# EAGLE board cerewet (EAGLE 7.2.0)
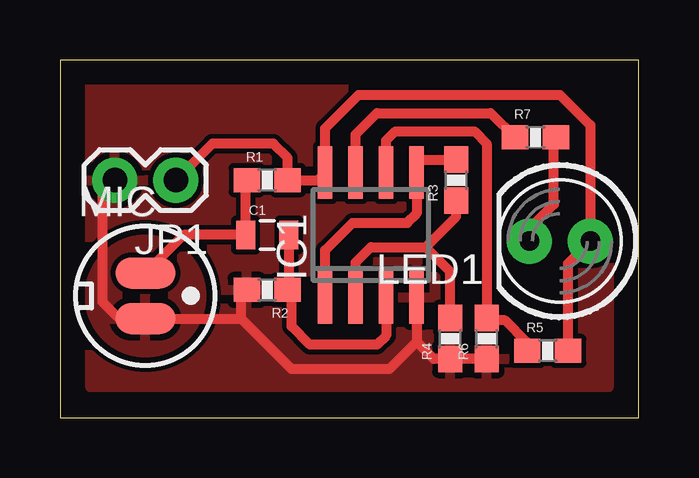
[diagram p0: board, top side]

Size 24.11 x 14.91 mm. Coordinates in mm from the lower left corner, seen from the top.
Outline: 0,0 24.11,0 24.11,14.91 0,14.91 0,0
Copper layers (1*16): Top 0.035mm / dielectric 1.5mm / Bottom 0.035mm
Design rules "default": minimum track width 10mil, minimum drill 24mil, track to track 8mil, track to pad 8mil, pad to pad 8mil, via to via 8mil, smd to smd 8mil, copper to edge 40mil, drill to drill 8mil, minimum pad ring 10mil, minimum via ring 8mil, stop-mask expansion 4mil, vias tented up to drill 0mil, thermal gap 10mil

## Footprints (pad centres in the part's own frame; a part is rotated, then mirrored left to right if it is on the bottom)
0805 = smd 0.8 x 1.2: 1 -0.9,0; 2 0.9,0
SO08 = smd 0.6 x 2.2: 1 -1.905,-2.6; 2 -0.635,-2.6; 3 0.635,-2.6; 4 1.905,-2.6; 5 1.905,2.6; 6 0.635,2.6; 7 -0.635,2.6; 8 -1.905,2.6
1X02 = drill 1.016 pad 1.88: 1 0,0; 2 2.54,0
LED5MM = drill 0.813 pad 1.88: A -1.27,0; K 1.27,0
WM-61A = smd 2.5 x 1.3: 1 0,0.95; 2 0,-0.95
0603-RES = smd 1.1 x 1: 1 -0.85,0; 2 0.85,0

## Placement (x,y rotation side)
C1  0.1uF  [0805]  8.64,7.62 0 top
IC1  LM358D  [SO08]  12.95,7.62 0 top
JP1  PWR  [1X02]  4.83,9.91 180 top
LED1  [LED5MM]  20.83,7.37 180 top
MIC  [WM-61A]  3.56,5.08 0 top
R1  1K  [0603-RES]  8.64,9.91 0 top
R2  100K  [0603-RES]  8.64,5.33 180 top
R3  100K  [0603-RES]  16.51,9.91 90 top
R4  1K  [0603-RES]  16.26,3.3 90 top
R5  100K  [0603-RES]  20.32,2.79 0 top
R6  10K  [0603-RES]  17.78,3.3 90 top
R7  100R  [0603-RES]  19.81,11.68 0 top

## Library data of the parts
C1 = SparkFun-Capacitors
IC1 = linear
JP1 = SparkFun-Connectors
LED1 = SparkFun-LED
MIC = microphon
R1-R7 = SparkFun-Resistors

## Nets
GND: IC1.4 JP1.2 MIC.2 R2.2 R4.1 R6.1
N$1: C1.1 MIC.1 R1.1
N$2: LED1.K R7.2
N$3: IC1.6 R5.1 R6.2
N$4: C1.2 IC1.3 R2.1
N$5: IC1.2 R3.1 R4.2
N$6: IC1.1 IC1.5 R3.2
N$7: IC1.7 R7.1
VCC: IC1.8 JP1.1 LED1.A R1.2 R5.2

## Tracks (layer width: path | path; a pad name or v marks a point on that pad's centre or on a via)
GND
  Top 0.406: IC1.4 14.86,3.17 | 14.86,3.17 13.72,2.03 9.65,2.03 7.55,4.13 | 7.87,5.25 R2.2 7.55,5.1 7.55,4.13 | 7.55,4.13 MIC.2 2.47,4.13 1.78,4.83 1.78,9.4 JP1.2 | 14.86,3.17 15.58,2.45 R4.1 R6.1
  pour Top: 1.27,13.97 22.86,13.97 22.86,1.27 1.27,1.27
N$1
  Top 0.406: MIC.1 5.15,7.62 C1.1 7.74,9.86 R1.1
N$2
  Top 0.406: LED1.K 19.56,7.87 20.57,8.89 20.57,11.6 R7.2
N$3
  Top 0.406: R6.2 17.78,4.23 | R6.2 17.78,11.43 17.27,11.94 13.97,11.94 13.59,11.56 IC1.6 | R5.1 19.47,3.14 18.54,4.06 17.87,4.06 R6.2
N$4
  Top 0.406: C1.2 9.54,5.38 R2.1 9.65,5.17 9.65,3.81 10.41,3.05 13.21,3.05 13.59,3.43 IC1.3
N$5
  Top 0.406: IC1.2 12.32,6.48 12.95,7.11 15.24,7.11 | 15.24,7.11 16.51,8.38 R3.1 | R4.2 16.26,6.1 15.24,7.11
N$6
  Top 0.406: IC1.1 11.05,6.99 12.19,8.13 14.48,8.13 14.86,8.51 IC1.5 14.86,10.76 R3.2
N$7
  Top 0.406: IC1.7 12.32,11.81 13.21,12.7 17.95,12.7 R7.1
VCC
  Top 0.406: JP1.1 6.35,11.43 8.89,11.43 9.49,10.83 R1.2 10.73,9.91 IC1.8 11.05,12.06 12.45,13.46 20.83,13.46 22.1,12.19 LED1.A 21.17,6.44 R5.2